# Altium PCB CFD_Chip_Test_v8_needToFixTerminationsAndLayout.PcbDoc (part 1 of 2)
Units mil, origin at the board's own origin, x right, y up, seen from the top; angles counter-clockwise.
Board outline 3180 x 3670 mil, 2 copper layers (Top Layer, Bottom Layer); 101 components, 102 nets, 456 pads, 105 vias.
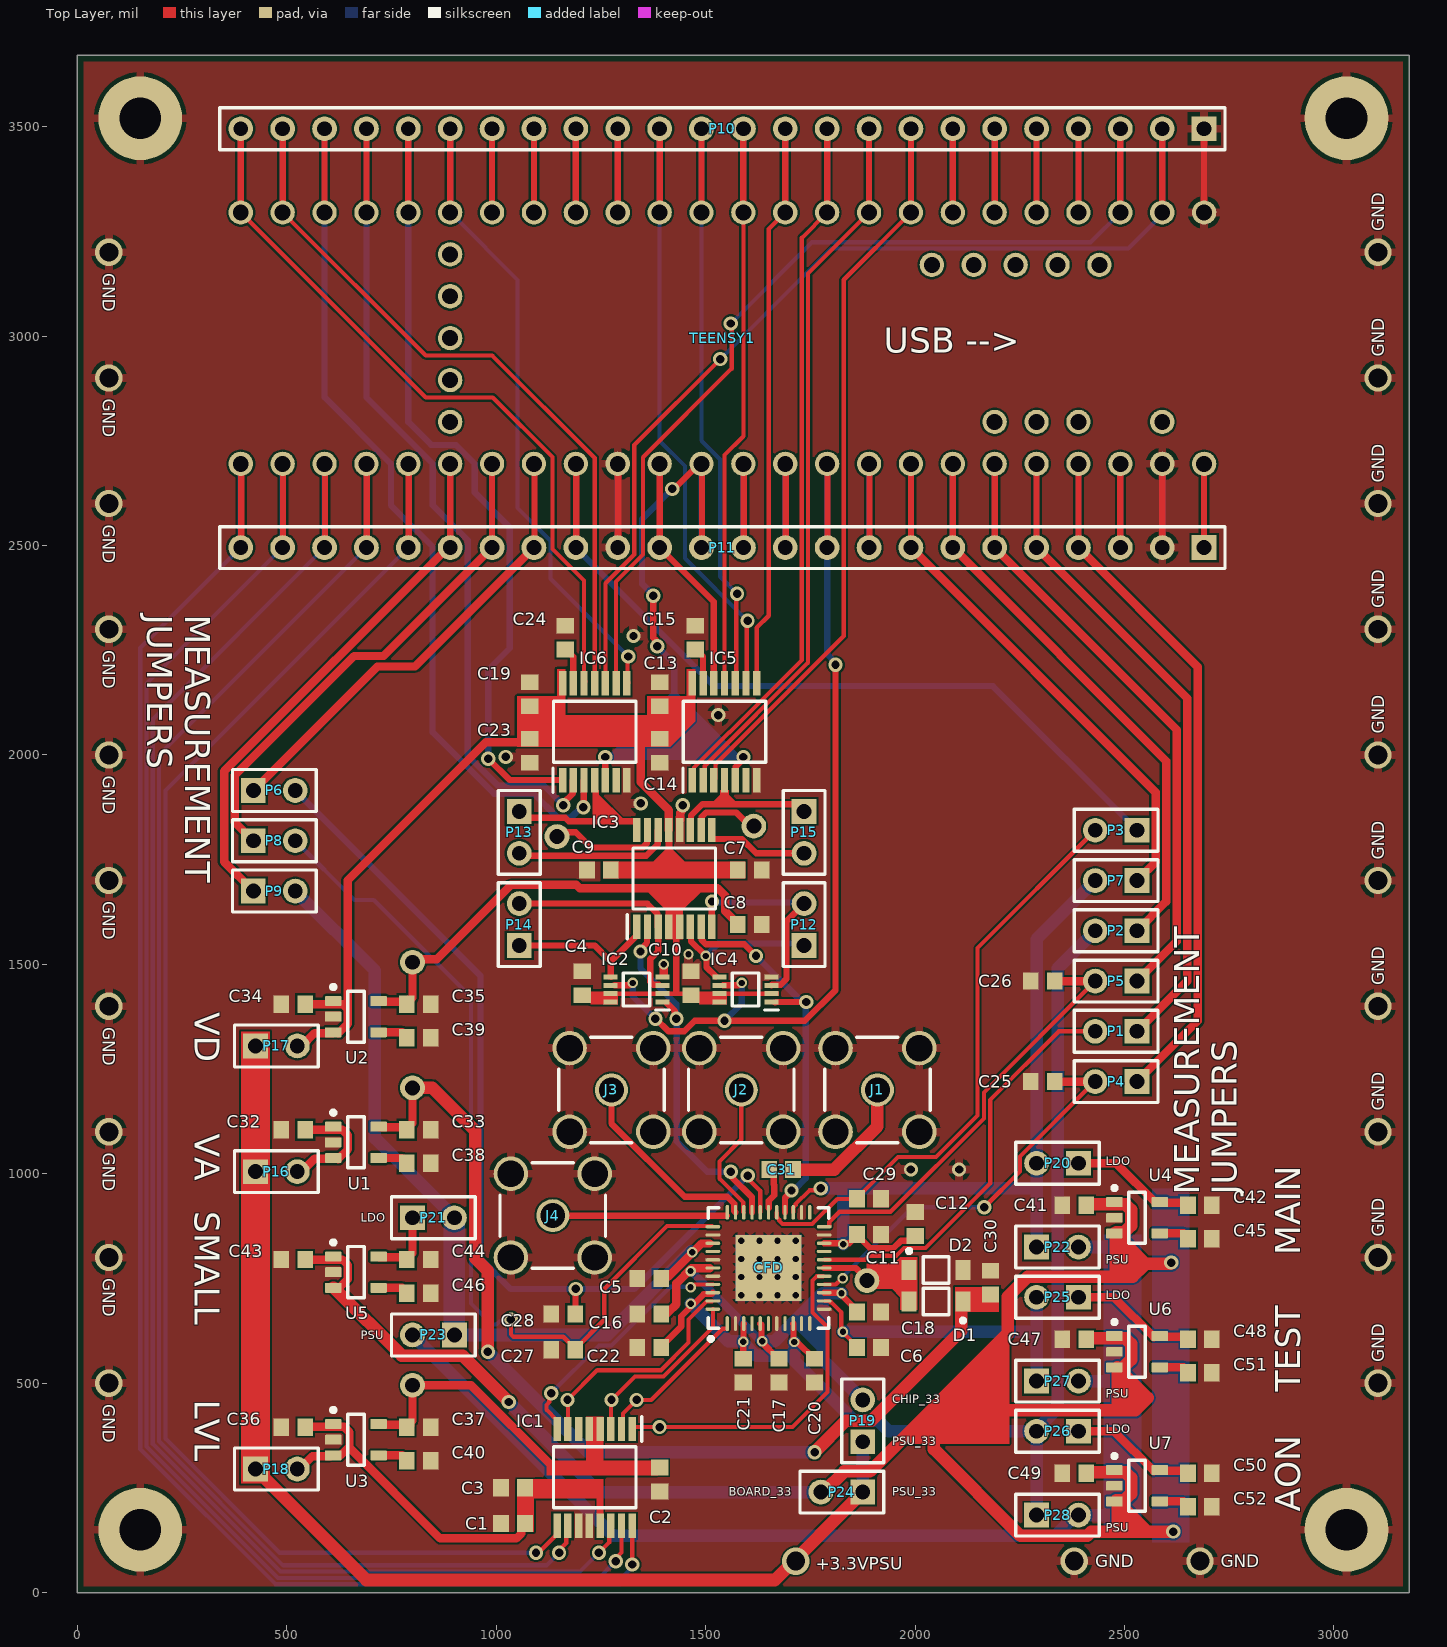
[diagram p0: Top Layer view]
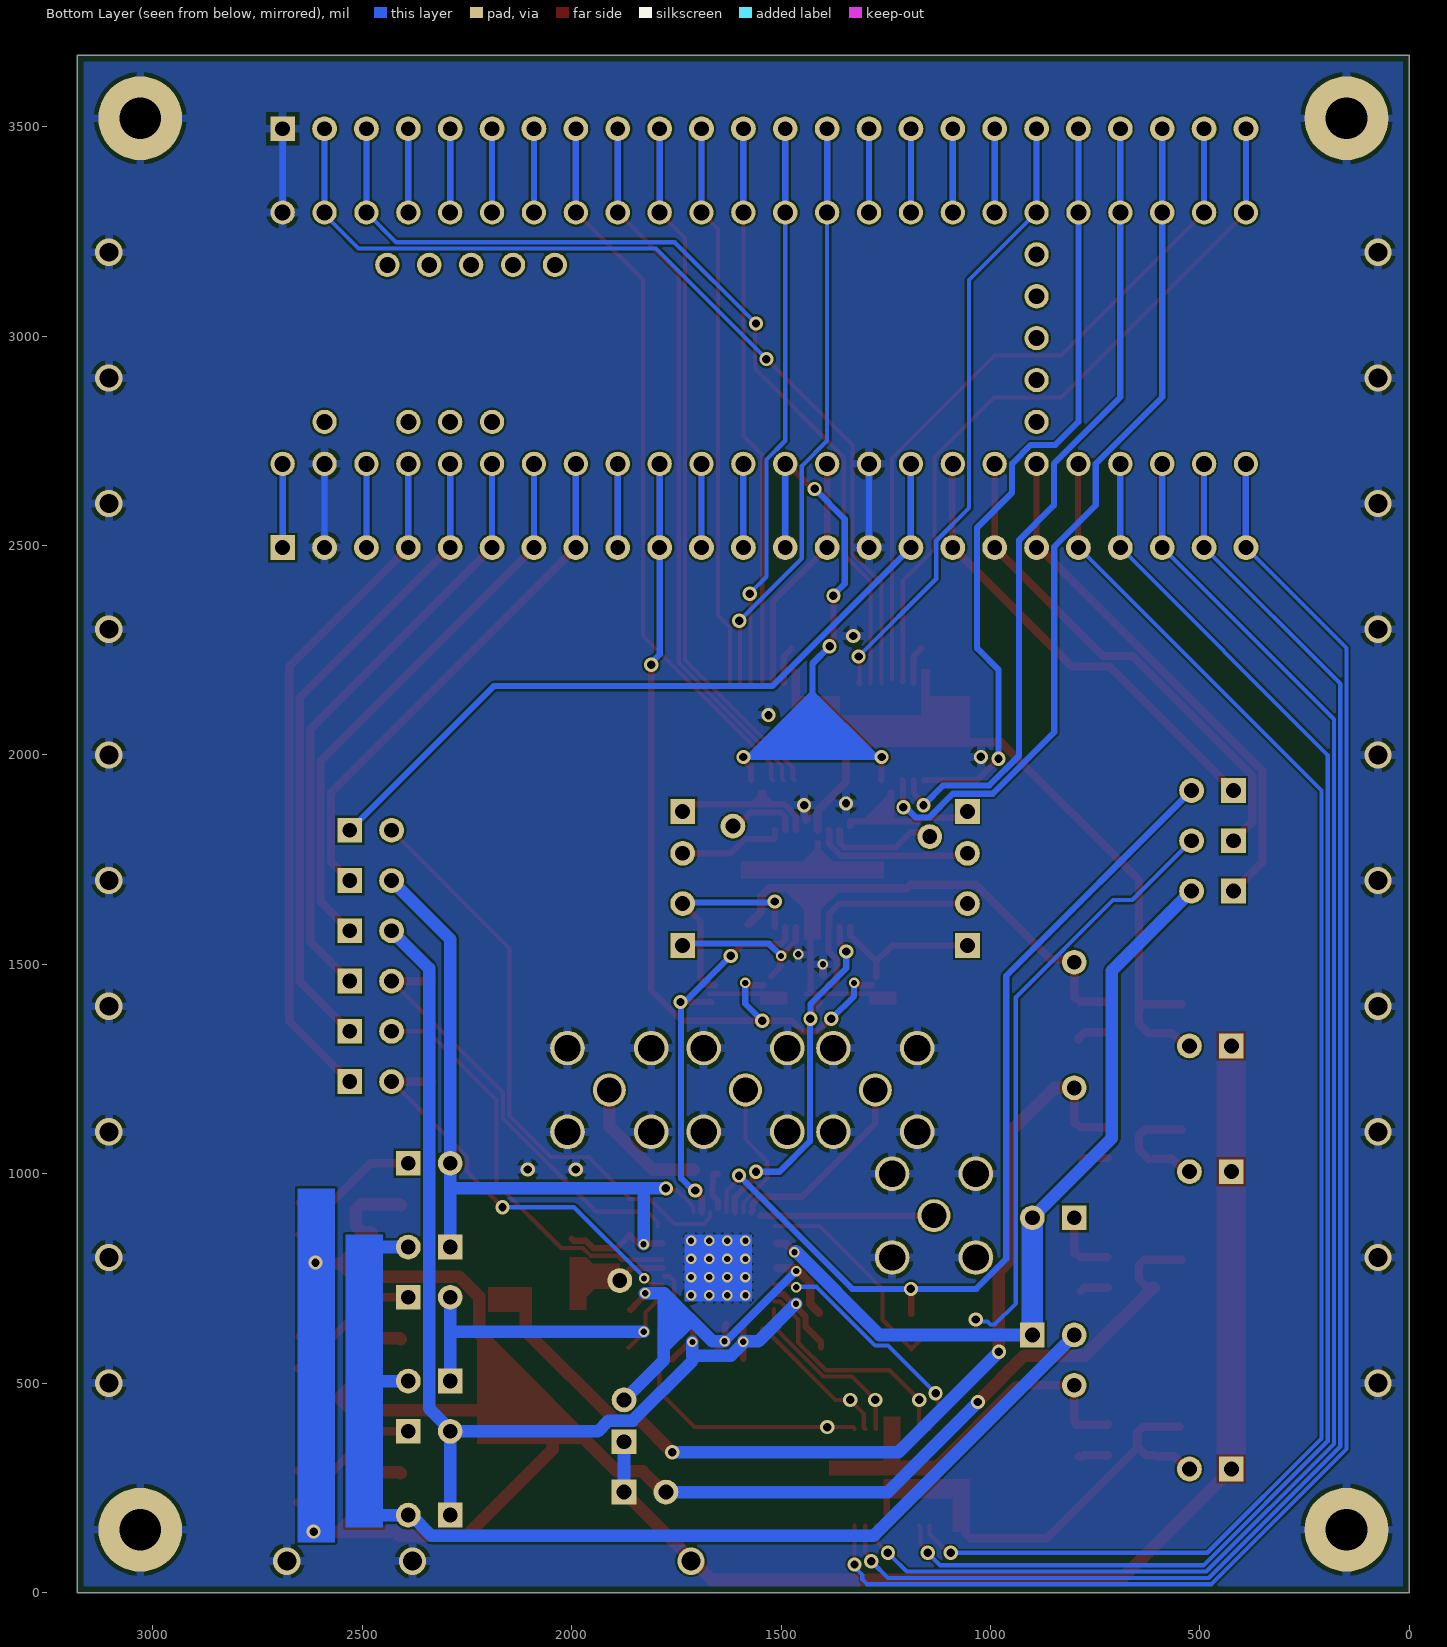
[diagram p1: Bottom Layer view, seen from below]
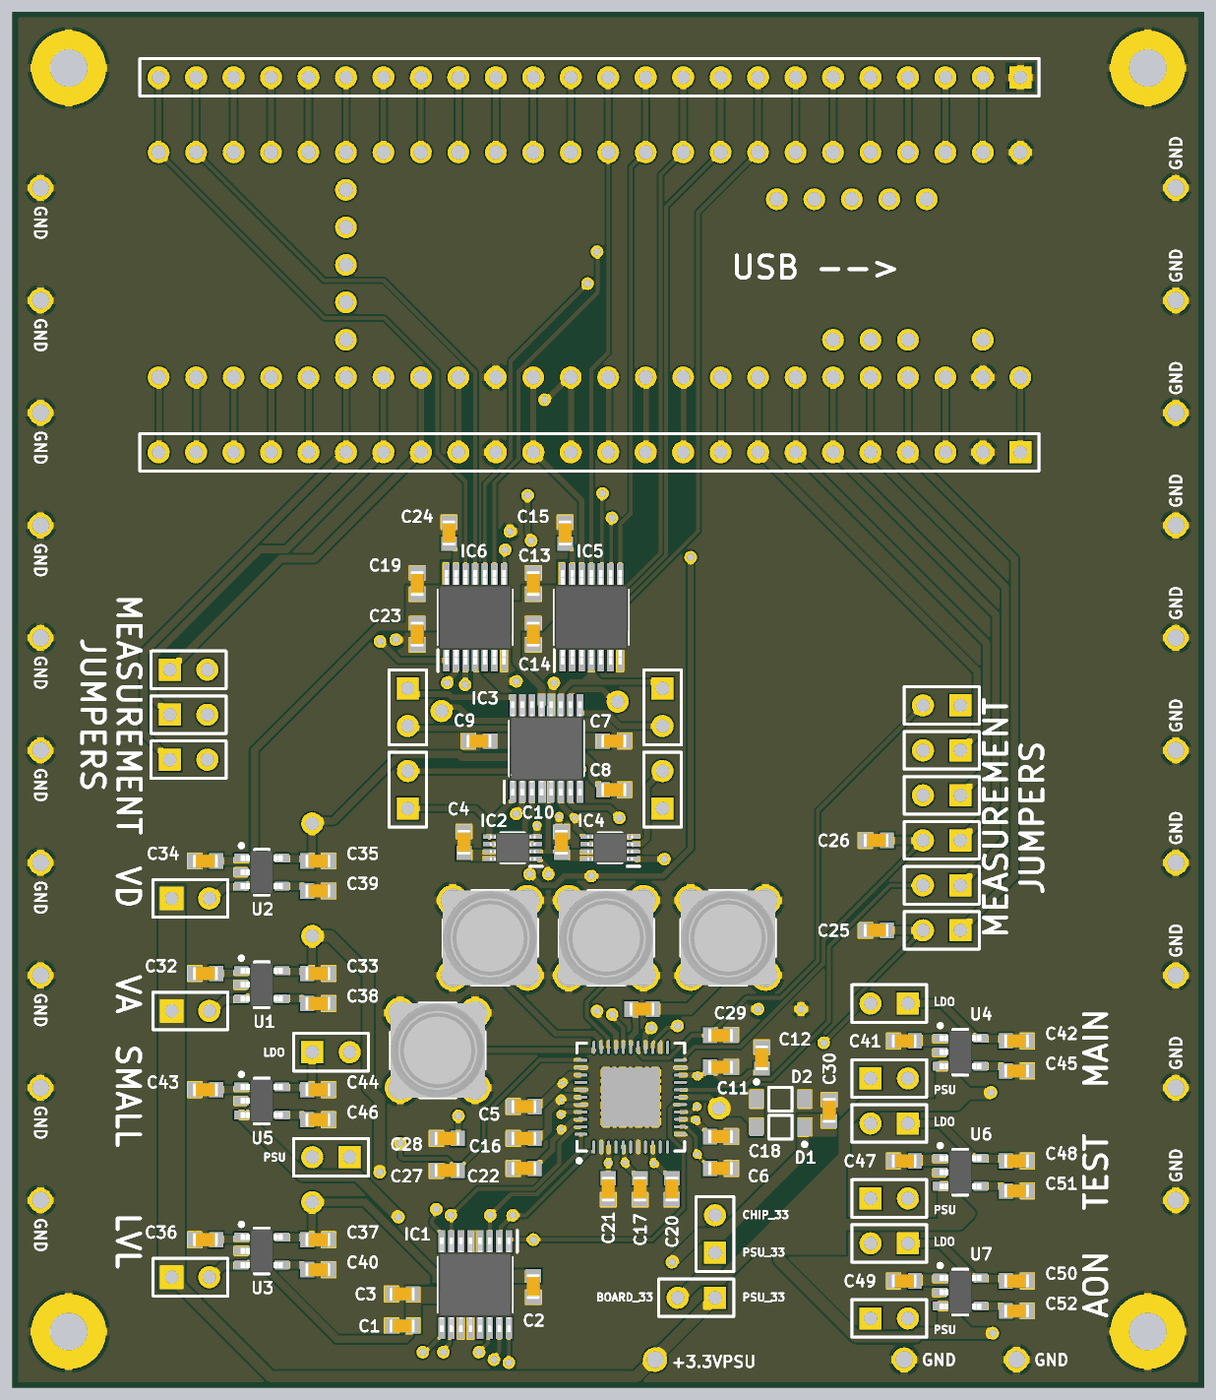
[diagram p2: 3D render of the assembled board from above, using the file's embedded part models]

## Layer stack, top to bottom
Top Solder: solder mask 0.4, Solder Resist, Dk 3.5
Top Layer: signal copper 1.4
Dielectric 1: dielectric 12.6, FR-4, Dk 4.8
Bottom Layer: signal copper 1.4
Bottom Solder: solder mask 0.4, Solder Resist, Dk 3.5

## Board outline
0,0 3180,0 3180,3670 0,3670

## Design rules (kind name [scope] priority, off if disabled: settings)
AcuteAngle [All] p1: minimum=6.00000000000000E+0001 checktracksonly=FALSE
BoardOutlineClearance [All] p1: gap=15 ignorepadtopadclearanceinfootprint=FALSE
Clearance Clearance_outa_inner2 [InNamedPolygon('outa_inner2')] p1: gap=40 ignorepadtopadclearanceinfootprint=FALSE except(0: Arc-Hole Track-Hole SMDPad-Hole THPad-Hole Via-Hole Fill-Hole Poly-Hole Region-Hole Text-Hole)
Clearance Clearance_gnd_adc_vbus [InNamedPolygon('gnd_adc') vs InNet('VBUS')] p2: gap=60 ignorepadtopadclearanceinfootprint=FALSE except(0: Arc-Hole Track-Hole SMDPad-Hole THPad-Hole Via-Hole Fill-Hole Poly-Hole Region-Hole Text-Hole)
Clearance Clearance_gnd_adc [InNamedPolygon('gnd_adc')] p3: gap=20 ignorepadtopadclearanceinfootprint=FALSE except(0: Arc-Hole Track-Hole SMDPad-Hole THPad-Hole Via-Hole Fill-Hole Poly-Hole Region-Hole Text-Hole)
Clearance Clearance_dgnd [InNamedPolygon('dgnd')] p4: gap=15 ignorepadtopadclearanceinfootprint=FALSE except(0: Arc-Hole Track-Hole SMDPad-Hole THPad-Hole Via-Hole Fill-Hole Poly-Hole Region-Hole Text-Hole)
Clearance Clearance_vbus_keepout [InPolygon vs OnLayer('Keep-Out Layer')] p5: gap=20 ignorepadtopadclearanceinfootprint=FALSE except(0: Arc-Hole Track-Hole SMDPad-Hole THPad-Hole Via-Hole Fill-Hole Poly-Hole Region-Hole Text-Hole)
Clearance Clearance_vbus [InNamedPolygon('vbus')] p6: gap=60 ignorepadtopadclearanceinfootprint=FALSE except(0: Arc-Hole Track-Hole SMDPad-Hole THPad-Hole Via-Hole Fill-Hole Poly-Hole Region-Hole Text-Hole)
Clearance Clearance_gnd [InNamedPolygon('gnd')] p7: gap=10 ignorepadtopadclearanceinfootprint=FALSE except(0: Arc-Hole Track-Hole SMDPad-Hole THPad-Hole Via-Hole Fill-Hole Poly-Hole Region-Hole Text-Hole)
Clearance [All] p8: gap=5 ignorepadtopadclearanceinfootprint=FALSE except(0: Arc-Hole Track-Hole SMDPad-Hole THPad-Hole Via-Hole Fill-Hole Poly-Hole Region-Hole Text-Hole)
DiffPairsRouting [All] p1: maxlimit=25 minlimit=5 mostfreqgap=6 toplayer_minwidth=10 toplayer_maxwidth=15 toplayer_prefwidth=15 bottomlayer_minwidth=10 bottomlayer_maxwidth=15 bottomlayer_prefwidth=15 maxuncoupledlength=500
HoleSize [All] p1: absolutevalues=TRUE maxlimit=300 minlimit=10 maxpercent=80.000 minpercent=20.000
MinimumAnnularRing [All] p1: minimumring=5
MinimumSolderMaskSliver [All] p1: minsoldermaskwidth=2
PlaneConnect [All] p1: planeconnectstyle=Relief reliefexpansion=5 reliefentries=4 reliefconductorwidth=10 reliefairgap=10
PolygonConnect PolygonConnect_4 [All vs IsNamedPolygon('NONET_L-01_P-001')] p1: thpad.connectstyle=Relief thpad.reliefconductorwidth=20 thpad.reliefentries=4 thpad.polygonreliefangle="90 Angle" thpad.airgapwidth=10 smdpad.connectstyle=Direct smdpad.reliefconductorwidth=10 smdpad.reliefentries=4 smdpad.polygonreliefangle="90 Angle" smdpad.airgapwidth=10 via.connectstyle=Relief via.reliefconductorwidth=20 via.reliefentries=4 via.polygonreliefangle="90 Angle" via.airgapwidth=10
PolygonConnect PolygonConnect_3 [All] p2: thpad.connectstyle=Relief thpad.reliefconductorwidth=20 thpad.reliefentries=4 thpad.polygonreliefangle="90 Angle" thpad.airgapwidth=10 smdpad.connectstyle=Direct smdpad.reliefconductorwidth=10 smdpad.reliefentries=4 smdpad.polygonreliefangle="90 Angle" smdpad.airgapwidth=10 via.connectstyle=Relief via.reliefconductorwidth=20 via.reliefentries=4 via.polygonreliefangle="90 Angle" via.airgapwidth=10
PolygonConnect PolygonConnect_2 [All vs IsNamedPolygon('NONET_L-01_P-001')] p3: thpad.connectstyle=Relief thpad.reliefconductorwidth=10 thpad.reliefentries=4 thpad.polygonreliefangle="90 Angle" thpad.airgapwidth=10 smdpad.connectstyle=Direct smdpad.reliefconductorwidth=10 smdpad.reliefentries=4 smdpad.polygonreliefangle="90 Angle" smdpad.airgapwidth=10 via.connectstyle=Relief via.reliefconductorwidth=20 via.reliefentries=4 via.polygonreliefangle="90 Angle" via.airgapwidth=10
PolygonConnect PolygonConnect_1 [All vs IsNamedPolygon('NONET_L-01_P-001')] p4: thpad.connectstyle=Relief thpad.reliefconductorwidth=10 thpad.reliefentries=4 thpad.polygonreliefangle="90 Angle" thpad.airgapwidth=10 smdpad.connectstyle=Direct smdpad.reliefconductorwidth=10 smdpad.reliefentries=4 smdpad.polygonreliefangle="90 Angle" smdpad.airgapwidth=10 via.connectstyle=Relief via.reliefconductorwidth=20 via.reliefentries=4 via.polygonreliefangle="90 Angle" via.airgapwidth=10
PolygonConnect [All] p5: connectstyle=Relief reliefconductorwidth=6 reliefentries=4 polygonreliefangle="90 Angle" airgapwidth=6
RoutingVias [All] p1: holewidth=12 width=24 viastyle="Through Hole" minholewidth=10 minwidth=22 maxholewidth=200 maxwidth=200
SilkToSilkClearance [All] p1: silktosilkclearance=5
SilkToSolderMaskClearance [IsPad] p1: minsilkscreentomaskgap=3 clearancetoexposedcopper=FALSE
SolderMaskExpansion [All] p1: expansion=2.2 istentingtop=FALSE
Width [All] p1: maxlimit=1000 minlimit=5 preferedwidth=10 minimp=50.000000 maximp=50.000000 favimp=50.000000
24 further rules are at their usual default settings.

## Classes and differential pairs
component class Teensy_Interface: C1 C2 C3 IC1 P1 P2 P3 P4 P5 P6 P7 P8 P9 P10 P11 TEENSY1
component class Power: C32 C33 C34 C35 C36 C37 C38 C39 C40 C41 C42 C43 C44 C45 C46 C47 C48 C49 C50 C51 C52 P16 P17 P18 P19 P20 P21 P22 P23 P24 P25 P26 P27 P28 U1 U2 U3 U4 U5 U6 U7
component class Chip_Inputs: C30 C31 D1 D2 J1 J2 J3 J4
component class Chip: C4 C5 C6 C7 C8 C9 C10 C11 C12 C13 C14 C15 C16 C17 C18 C19 C20 C21 C22 C23 C24 C25 C26 C27 C28 C29 CFD IC2 IC3 IC4 IC5 IC6 P12 P13 P14 P15

## Components (designator, comment, footprint, x,y, rotation, side; value= is the part's Value field where it differs from the comment)
C1 "1uF" CAPC1608X90X35ML10T15 1040,165 r0 top
C2 "100nF" CAPC1608X90X35ML10T15 1390,270 r270 top
C3 "100nF" CAPC1608X90X35ML10T15 1040,250 r0 top
C4 "10nF" CAPC1608X90X35ML10T15 1205,1455 r270 top
C5 "10nF" CAPC1608X90X35ML10T15 1365,750 r0 top
C6 "10nF" CAPC1608X90X35ML10T15 1890,585 r0 top
C7 "10nF" CAPC1608X90X35ML10T15 1605,1725 r180 top
C8 "100nF" CAPC1608X90X35ML10T15 1605,1595 r180 top
C9 "100nF" CAPC1608X90X35ML10T15 1245,1725 r0 top
C10 "10nF" CAPC1608X90X35ML10T15 1465,1455 r270 top
C11 "10nF" CAPC1608X90X35ML10T15 1890,855 r180 top
C12 "10nF" CAPC1608X90X35ML10T15 2000,880 r270 top
C13 "1uF" CAPC1608X90X35ML10T15 1390,2145 r90 top
C14 "100nF" CAPC1608X90X35ML10T15 1390,2010 r270 top
C15 "1uF" CAPC1608X90X35ML10T15 1475,2280 r90 top
C16 "10nF" CAPC1608X90X35ML10T15 1365,665 r0 top
C17 "10nF" CAPC1608X90X35ML10T15 1675,530 r90 top
C18 "10nF" CAPC1608X90X35ML10T15 1890,670 r180 top
C19 "1uF" CAPC1608X90X35ML10T15 1080,2145 r90 top
C20 "10nF" CAPC1608X90X35ML10T15 1760,530 r90 top
C21 "10nF" CAPC1608X90X35ML10T15 1590,530 r90 top
C22 "10nF" CAPC1608X90X35ML10T15 1365,585 r0 top
C23 "100nF" CAPC1608X90X35ML10T15 1080,2010 r270 top
C24 "1uF" CAPC1608X90X35ML10T15 1165,2280 r90 top
C25 "(10nF)" CAPC1608X90X35ML10T15 2305,1220 r0 top
C26 "(10nF)" CAPC1608X90X35ML10T15 2305,1460 r0 top
C27 "(10nF)" CAPC1608X90X35ML10T15 1160,580 r0 top
C28 "(10nF)" CAPC1608X90X35ML10T15 1160,665 r0 top
C29 "(10nF)" CAPC1608X90X35ML10T15 1890,940 r180 top
C30 "10nF" CAPC1608X90X35ML10T15 2180,740 r270 top
C31 "Value?" CAPC1608X90X35ML10T15 1680,1010 r0 top
C32 "(Value)" CAPC1608X90X35ML10T15 515,1105 r180 top
C33 "(Value)" CAPC1608X90X35ML10T15 815,1105 r0 top
C34 "(Value)" CAPC1608X90X35ML10T15 515,1405 r180 top
C35 "(Value)" CAPC1608X90X35ML10T15 815,1405 r0 top
C36 "(Value)" CAPC1608X90X35ML10T15 515,395 r180 top
C37 "(Value)" CAPC1608X90X35ML10T15 815,395 r0 top
C38 "(Value)" CAPC1608X90X35ML10T15 815,1025 r0 top
C39 "(Value)" CAPC1608X90X35ML10T15 815,1325 r0 top
C40 "(Value)" CAPC1608X90X35ML10T15 815,315 r0 top
C41 "(Value)" CAPC1608X90X35ML10T15 2380,925 r180 top
C42 "(Value)" CAPC1608X90X35ML10T15 2680,925 r0 top
C43 "(Value)" CAPC1608X90X35ML10T15 515,795 r180 top
C44 "(Value)" CAPC1608X90X35ML10T15 815,795 r0 top
C45 "(Value)" CAPC1608X90X35ML10T15 2680,845 r0 top
C46 "(Value)" CAPC1608X90X35ML10T15 815,715 r0 top
C47 "(Value)" CAPC1608X90X35ML10T15 2380,605 r180 top
C48 "(Value)" CAPC1608X90X35ML10T15 2680,605 r0 top
C49 "(Value)" CAPC1608X90X35ML10T15 2380,285 r180 top
C50 "(Value)" CAPC1608X90X35ML10T15 2680,285 r0 top
C51 "(Value)" CAPC1608X90X35ML10T15 2680,525 r0 top
C52 "(Value)" CAPC1608X90X35ML10T15 2680,205 r0 top
CFD "CFD_package" QFN50P700X700X80_HS-45N_WIDEVIAS 1650,775 r90 top
D1 "" ONSC-SOD-123-2-425-04_V 2050,695 r180 top
D2 "" ONSC-SOD-123-2-425-04_V 2050,770 r0 top
IC1 "MAX13003EEUE+" SOP65P640X110-16N 1235,275 r270 top
IC2 "NL17SZ74USG" SOP50P310X90-8N 1335,1440 r180 top
IC3 "MAX13003EEUE+" SOP65P640X110-16N 1425,1705 r90 top
IC4 "NL17SZ74USG" SOP50P310X90-8N 1595,1440 r180 top
IC5 "TDC7200PWR" SOP65P640X120-14N 1545,2055 r90 top
IC6 "TDC7200PWR" SOP65P640X120-14N 1235,2055 r90 top
J1 "5-1814832-1" TECO-5-1814832-1_V 1910,1200 r0 top
J2 "5-1814832-1" TECO-5-1814832-1_V 1585,1200 r0 top
J3 "5-1814832-1" TECO-5-1814832-1_V 1275,1200 r0 top
J4 "5-1814832-1" TECO-5-1814832-1_V 1135,900 r0 top
P1 "Header 2" HDR1X2 2530,1340 r180 top
P2 "Header 2" HDR1X2 2530,1580 r180 top
P3 "Header 2" HDR1X2 2530,1820 r180 top
P4 "Header 2" HDR1X2 2530,1220 r180 top
P5 "Header 2" HDR1X2 2530,1460 r180 top
P6 "Header 2" HDR1X2 420,1915 r0 top
P7 "Header 2" HDR1X2 2530,1700 r180 top
P8 "Header 2" HDR1X2 420,1795 r0 top
P9 "Header 2" HDR1X2 420,1675 r0 top
P10 "Header 24" HDR1X24 2690,3495 r180 top
P11 "Header 24" HDR1X24 2690,2495 r180 top
P12 "Header 2" HDR1X2 1735,1545 r90 top
P13 "Header 2" HDR1X2 1055,1865 r270 top
P14 "Header 2" HDR1X2 1055,1545 r90 top
P15 "Header 2" HDR1X2 1735,1865 r270 top
P16 "Header 2" HDR1X2 425,1005 r0 top
P17 "Header 2" HDR1X2 425,1305 r0 top
P18 "Header 2" HDR1X2 425,295 r0 top
P19 "Header 2" HDR1X2 1875,360 r90 top
P20 "Header 2" HDR1X2 2390,1025 r180 top
P21 "Header 2" HDR1X2 800,895 r0 top
P22 "Header 2" HDR1X2 2290,825 r0 top
P23 "Header 2" HDR1X2 900,615 r180 top
P24 "Header 2" HDR1X2 1875,240 r180 top
P25 "Header 2" HDR1X2 2390,705 r180 top
P26 "Header 2" HDR1X2 2390,385 r180 top
P27 "Header 2" HDR1X2 2290,505 r0 top
P28 "Header 2" HDR1X2 2290,185 r0 top
TEENSY1 "TEENSY_3.5/3.6" TEENSY_3.5/3.6 1590,2995 r180 top
U1 "TPS73218DBVT" DBV0005A_N 665,1075 r0 top
U2 "TPS73218DBVT" DBV0005A_N 665,1375 r0 top
U3 "TPS73218DBVT" DBV0005A_N 665,365 r0 top
U4 "TPS73218DBVT" DBV0005A_N 2530,895 r0 top
U5 "TPS73218DBVT" DBV0005A_N 665,765 r0 top
U6 "TPS73218DBVT" DBV0005A_N 2530,575 r0 top
U7 "TPS73218DBVT" DBV0005A_N 2530,255 r0 top

## Footprints (in the part's own frame and the unit in brackets; to place one, negate y for a bottom-side part, rotate by r counter-clockwise, add the part's x,y. Pads: shape width x height; smd on the part's side, far side on the other; paste and mask are expansions set on the pad)
CAPC1608X90X35ML10T15 [mm] "Chip Capacitor, 2-Leads, Body 1.7x0.9mm, IPC Low Density"
  rect 0.95x1.05 smd: 1(-0.725,0) 2(0.725,0)
  body extent -0.85,-0.45 0.85,0.45, height 0.9
DBV0005A_N [mm] "SOT23, 5-Leads, Body 3.05x1.75mm, Pitch 0.95mm, IPC Medium Density"
  rrect17% 1x0.6 smd: 1(-1.375,0.95) 2(-1.375,0) 3(-1.375,-0.95) 4(1.375,-0.95) 5(1.375,0.95)
  silkscreen extent -1.5,-1.55 0.5,1.92, body extent -1.42,-1.46 1.42,1.46, height 1.08
HDR1X2 [mm] "Connector; Header; 2 Position"
  rect 1.5x1.5 hole 0.9: 1(0,0)
  round 1.5 hole 0.9: 2(2.54,0)
  silkscreen extent -1.27,-1.27 3.81,1.27
HDR1X24 [mm] "Connector; Header; 24 Position"
  rect 1.5x1.5 hole 0.9: 1(0,0)
  round 1.5 hole 0.9: 2(2.54,0) 3(5.08,0) 4(7.62,0) 5(10.16,0) 6(12.7,0) 7(15.24,0) 8(17.78,0) 9(20.32,0) 10(22.86,0) 11(25.4,0) 12(27.94,0) 13(30.48,0) 14(33.02,0) 15(35.56,0) 16(38.1,0) 17(40.64,0) 18(43.18,0) 19(45.72,0) 20(48.26,0) 21(50.8,0) 22(53.34,0) 23(55.88,0) 24(58.42,0)
  silkscreen extent -1.27,-1.27 59.69,1.27
ONSC-SOD-123-2-425-04_V [mm] "SOD, 2-Leads, Body 2.69x1.6mm"
  rect 0.91x1.22 smd: 1(-1.635,0) 2(1.635,0)
  silkscreen extent -1.76,-0.8 0.78,1.28, body extent -1.35,-0.8 1.35,0.8, height 1.35
QFN50P700X700X80_HS-45N_WIDEVIAS [mm] "QFN, 44-Leads, Body 7.00x7.00mm, Pitch 0.50mm, Thermal Pad 4.00x4.00mm, IPC Medium Density"
  oval 0.9x0.2 smd: 1(-3.375,2.5) 2(-3.375,2) 3(-3.375,1.5) 4(-3.375,1) 5(-3.375,0.5) 6(-3.375,0) 7(-3.375,-0.5) 8(-3.375,-1) 9(-3.375,-1.5) 10(-3.375,-2) 11(-3.375,-2.5) 23(3.375,-2.5) 24(3.375,-2) 25(3.375,-1.5) 26(3.375,-1) 27(3.375,-0.5) 28(3.375,0) 29(3.375,0.5) 30(3.375,1) 31(3.375,1.5) 32(3.375,2) 33(3.375,2.5)
  oval 0.2x0.9 smd: 12(-2.5,-3.375) 13(-2,-3.375) 14(-1.5,-3.375) 15(-1,-3.375) 16(-0.5,-3.375) 17(0,-3.375) 18(0.5,-3.375) 19(1,-3.375) 20(1.5,-3.375) 21(2,-3.375) 22(2.5,-3.375) 34(2.5,3.375) 35(2,3.375) 36(1.5,3.375) 37(1,3.375) 38(0.5,3.375) 39(0,3.375) 40(-0.5,3.375) 41(-1,3.375) 42(-1.5,3.375) 43(-2,3.375) 44(-2.5,3.375)
  rect 4x4 smd: 35(0,0)
  silkscreen extent -4.42,-3.65 3.65,3.65, body extent -3.5,-3.5 3.5,3.5, height 0.8
SOP50P310X90-8N [mm]
  rect 0.85x0.3 smd: 1(-1.575,0.75) 2(-1.575,0.25) 3(-1.575,-0.25) 4(-1.575,-0.75) 5(1.575,-0.75) 6(1.575,-0.25) 7(1.575,0.25) 8(1.575,0.75)
  silkscreen extent -2,-1 0.8,1.25, body extent -1.55,-1 1.55,1, height 0.9
SOP65P640X110-16N [mm]
  rect 1.475x0.45 smd: 1(-2.938,2.275) 2(-2.938,1.625) 3(-2.938,0.975) 4(-2.938,0.325) 5(-2.938,-0.325) 6(-2.938,-0.975) 7(-2.938,-1.625) 8(-2.938,-2.275) 9(2.938,-2.275) 10(2.938,-1.625) 11(2.938,-0.975) 12(2.938,-0.325) 13(2.938,0.325) 14(2.938,0.975) 15(2.938,1.625) 16(2.938,2.275)
  silkscreen extent -3.67,-2.5 1.85,2.85, body extent -3.2,-2.5 3.2,2.5, height 1.1
SOP65P640X120-14N [mm]
  rect 1.475x0.45 smd: 1(-2.938,1.95) 2(-2.938,1.3) 3(-2.938,0.65) 4(-2.938,0) 5(-2.938,-0.65) 6(-2.938,-1.3) 7(-2.938,-1.95) 8(2.938,-1.95) 9(2.938,-1.3) 10(2.938,-0.65) 11(2.938,0) 12(2.938,0.65) 13(2.938,1.3) 14(2.938,1.95)
  silkscreen extent -3.67,-2.5 1.85,2.52, body extent -3.2,-2.5 3.2,2.5, height 1.13
TECO-5-1814832-1_V [mm] "THD, 5-Leads, Body 6.4x6.4mm, Pitch 5.08mm"
  round 2 hole 1.5: 1(0,0)
  round 2.1 hole 1.6: 2(-2.54,2.54) 3(-2.54,-2.54) 4(2.54,-2.54) 5(2.54,2.54)
  silkscreen extent -3.2,-3.2 3.2,3.2, body extent -3.21,-3.21 3.19,3.19, height 9.5
TEENSY_3.5/3.6 [mil]
  round 58 / inner round 60 / far side round 58 hole 38: 0/RX(-1000,-300) 1/TX(-900,-300) 2(-800,-300) 3/CANTX(-700,-300) 3V3(300,-300) 3V3_2(700,-100) 3V3_LO(-900,300) 4/CANRX(-600,-300) 5(-500,-300) 6(-400,-300) 7(-300,-300) 8(-200,-300) 9/CS(-100,-300) 10/CS(0,-300) 11/MOSI(100,-300) 12/MISO(200,-300) 13/SCK(200,300) 14/A0(100,300) 15/A1(0,300) 16/A2(-100,300) 17/A3(-200,300) 18/A4/SDA(-300,300) 19/A5/SCL(-400,300) 20/A6(-500,300) 21/A7(-600,300) 21/DAC0(500,300) 22/A8(-700,300) 23/A9(-800,300) 24(400,-300) 25(500,-300) 26(600,-300) 27(700,-300) 28(800,-300) 29(900,-300) 30(1000,-300) 31/A12(1100,-300) 32/A13(1200,-300) 33/A14(1200,300) 34/A15(1100,300) 35/A16(1000,300) 36/A17(900,300) 37/A18(800,300) 38/A19(700,300) 39/A20(600,300) A10(-700,200) A11(-600,200) A22/DAC1(400,300) AGND(-1000,300) AREF(-800,200) GND(-1100,-300) GND2(300,300) GND3(700,0) PROG(700,100) RESET(700,200) U5V(-850,-175) UD+(-650,-175) UD-(-750,-175) UGND1(-550,-175) UGND2(-450,-175) VBAT(700,-200) VIN(-1100,300) VUSB(-1000,200)

## Part data
C1 C2 C3 C4 C5 C6 C7 C8 C9 C10 C11 C12 C13 C14 C15 C16 C17 C18 C19 C20 C21 C22 C23 C24 C25 C26 C27 C28 C29 C30 C31 C32 C33 C34 C35 C36 C37 C38 C39 C40 C41 C42 C43 C44 C45 C46 C47 C48 C49 C50 C51 C52: library part CMP-2000-04945-1, "0603", Capacitance=22pF, Dielectric=C0G, Manufacturer=Murata, Package Description="2-Pin Surface Mount Device, Body 1.6 x 0.8 mm", Package Reference=603, Rated Voltage=50V, Tolerance (%)=±5%, Case Size/Dimension=0603, Datasheet URL=https://datasheet.ciiva.com/11786/0900766b807a1cab-11786398.pdf, Datasheet Version=Jul-06, Manufacturer URL=http://www.murata.com/
D1 D2: library part CMP-1060-00509-1, "Zener Voltage Regulator, 2-Pin SOD-123, Pb-Free, Tape and Reel", Manufacturer="On Semiconductor", PartNumber=MMSZ4679T1G, ComponentLink1Description="Manufacturer URL", ComponentLink1URL=http://www.onsemi.com/, ComponentLink2Description=Datasheet, ComponentLink2URL=http://www.onsemi.com/pub_link/Collateral/MMSZ4678T1-D.PDF, ComponentLink3Description="Package Specification", ComponentLink3URL=http://www.onsemi.com/pub_link/Collateral/425-04.PDF, DatasheetVersion="Rev. 9", Mounting Technology="Surface Mount", P Max (W)=0.5, PackageDescription="2-Pin SOD, Body 1.6 x 2.69 mm", PackageReference=SOD-123-2-425-04, PackageVersion="Rev. G, 10/2009", Packing="Tape and Reel", RoHS=Pb-Free, VZ Typ (V)=2
IC1 IC3: "Integrated Circuit", Manufacturer_Name="Maxim Integrated", Datasheet Link=https://pdfserv.maximintegrated.com/en/ds/MAX13000E-MAX13005E.pdf, Height=1.1mm, Manufacturer_Part_Number=MAX13003EEUE+
IC2 IC4: "Flip Flops 1.65-5.5V CMOS Single D-Type", Manufacturer_Name="ON Semiconductor", Datasheet Link=http://www.onsemi.com/pub/Collateral/NL17SZ74-D.PDF, Height=0.9mm, Manufacturer_Part_Number=NL17SZ74USG
IC5 IC6: "Integrated Circuit", Manufacturer_Name="Texas Instruments", Datasheet Link=http://www.ti.com/lit/gpn/tdc7200, Height=1.2mm, Manufacturer_Part_Number=TDC7200PWR
J1 J2 J3 J4: library part CMP-2000-05415-1, "SMA Connector, Pitch 5.08 mm, 1 Position, Height 9.5 mm, Tail Length 4 mm, -65 to 165 degC, RoHS, Bulk", Frequency Max=3GHz, Manufacturer="TE Connectivity", Package Description="SMA Connector, Pitch 5.08 mm, 1 Position, Height 9.5 mm, Tail Length 4 mm", Coaxial Cable Types=-, Coaxial Termination=Solder, Connector Body Style=StraightJack, Connector Mounting=PCBMount, Connector Type=SMACoaxial, Contact Material=BerylliumCopper, Contact Plating=GoldPlatedContacts, Datasheet URL=http://www.onlinecomponents.com/productFiles/mf-AMP/eng_cd_1814832_a.pdf, Datasheet Version="Rev. B1, 03/2011", Impedance=50ohm, Manufacturer URL=http://www.te.com/, Package Reference=5-1814832-1, Product Range=ZDCSeries, SVHC=NoSVHC(15-Jun-2015)
P1 P2 P3 P4 P5 P6 P7 P8 P9 P12 P13 P14 P15 P16 P17 P18 P19 P20 P21 P22 P23 P24 P25 P26 P27 P28: "Header, 2-Pin", LatestRevisionDate=17-Jul-2002, LatestRevisionNote="Re-released for DXP Platform.", Publisher="Altium Limited"
P10 P11: "Header, 24-Pin", LatestRevisionDate=17-Jul-2002, LatestRevisionNote="Re-released for DXP Platform.", Publisher="Altium Limited"
U1 U2 U3 U4 U5 U6 U7: library part CMP-0394-00378-2, "Single Output Fast Transient Response LDO, 200 mA, Fixed 1.8 V Output, 1.7 to 5.5 V Input, with Reverse Current Protection, 5-pin SOT-23 (DBV), -40 to 85 degC, Green (RoHS & no Sb/Br)", Manufacturer="Texas Instruments", Accuracy(%)=1, Code_JEDEC=MO-178, ComponentLink1Description="Manufacturer URL", ComponentLink1URL=http://www.ti.com/, ComponentLink2Description=Datasheet, ComponentLink2URL=http://www.ti.com/general/docs/lit/getliterature.tsp?genericPartNumber=TPS73218&fileType=pdf, ComponentLink3Description="Package Specification", ComponentLink3URL=http://www.ti.com/litv/pdf/mpds018i, DatasheetVersion=SBVS037O, Eco-Plan="Green (RoHS & no Sb/Br)", Fixed Output Options(V)=1.8, Iout(Max)(A)=0.25, Iq(Typ)(mA)=0.4, Mounting Technology="Surface Mount", PackageDescription="5-Pin Plastic Small Outline, Body 1.60 Ãƒâ€” 2.90 mm, Pitch 0.95 mm", PackageReference=DBV0005A, PackageVersion=4073253-4/K, PartNumber=TPS73218DBVT, SubFamily="Single Channel LDO", Vdo(Typ)(mV)=40, Vin(Max)(V)=5.5, Vin(Min)(V)=1.7, Vout Adj(Max)(V)=1.8, Vout Adj(Min)(V)=1.8
TEENSY1: DeviceSetName=TEENSY_3.5/3.6, GateName_1=G$1, LibraryName=Teensy356, Package=TEENSY_3.5/3.6, SymbolName_1=TEENSY_3.5/3.6

## Free pads (board coordinates)
  round 200 hole 100: 3(150,150) 3(150,3520) 3(3030,150) 3(3030,3520)
  round 59.06 hole 35.43: 4(800,495) 4(800,1205) 4(800,1505) 4(1145,1805) 4(1615,1830) 4(1885,745)

## Via types
v1: diameter 34, hole 20, Top Layer to Bottom Layer, 50 vias
v2: diameter 25, hole 15, Top Layer to Bottom Layer, 32 vias
v3: diameter 65, hole 45, Top Layer to Bottom Layer, 23 vias

## Nets (pads, with @x,y where several pads share a name; then routed paths per layer and width w, separated by ;. In a path a pad name is that pad's centre, name@x,y a point inside that pad or via, vN(x,y) a via of type N, cw(c..) or ccw(c..) an arc to the next point about the centre after c; other vN are vias at no path point)
+1.8VA: C30.2 C33.1 D1.1 pad.4@800,1205 U1.5 | length 2342.3
  Top Layer w20: U1.5@720.94,1110.59 785.59,1110.59 C33.1@790,1115 ; C33.1@800,1120.51 pad.4@800,1205
  Top Layer w30: pad.4@800,1205 847.43,1205 949.53,1102.9 949.53,798.73 980,768.25 v1(980,575) ; v1(1760,335) 1835.47,410.47 1895.51,410.47 2110,624.96 2110,685 2155,685
  Bottom Layer w30: v1(980,575) 1220,335 v1(1760,335)
+1.8VD: C4.2 C8.2 C10.2 C35.1 IC2.2 IC2.7 IC2.8 IC3.4 IC3.5 IC4.2 IC4.7 IC4.8 pad.4@800,1505 U2.5 | length 1206.1
  Top Layer w15: 1429.67,1435 1429.67,1569.67 IC3.5@1430,1570
  Top Layer w20: U2.5@720.94,1410.59 785.59,1410.59 C35.1@790,1415 ; C35.1@800,1420.51 800,1505 807.47,1512.47 858.04,1512.47 1035.1,1689.53 1191.35,1689.53 1198.87,1682 1528.25,1682 1547,1663.25 1547,1626.43 C8.2@1578.43,1595
+1.8VD_SHIFT: C2.1 C37.1 IC1.4 IC1.5 pad.4@800,495 U3.5 | length 594.7
  Top Layer w20: U3.5 720.94,400.59 794.41,400.59 795,400 795,405.51 800,410.51 800,495 940,495 1135,300 1135,295
+1.8VDDAON: C50.1 P26.1 U7.5 | length 287.8
  Top Layer w20: P26.1 2475,385 U7.5@2570,290 ; U7.5@2585.94,290.59 C50.1@2654.41,290.59
+1.8VDDMAIN: C42.1 P20.1 U4.5 | length 287.8
  Top Layer w20: P20.1 2480,1025 U4.5@2575,930 ; U4.5@2585.94,930.59 C42.1@2649.41,930.59
+1.8VDDSMALL: C44.1 P21.1 U5.5 | length 155.4
  Top Layer w20: U5.5@720.94,800.59 785.59,800.59 C44.1@790,805 ; C44.1@800,810.51 P21.1
+1.8VDDTEST: C48.1 P25.1 U6.5 | length 282.8
  Top Layer w20: P25.1 2475,705 U6.5@2570,610 ; U6.5@2585.94,610.59 C48.1@2649.41,610.59
+1.8VPSU: P22.2 P23.2 P27.2 P28.2 | length 2044.1
  Bottom Layer w30: P23.2 1279.53,135.47 2334.13,135.47 2383.66,185 P28.2 2470,185 ; P27.2 2470,505 ; P22.2 2465,825
+3.3VA: C32.1 P16.2 U1.1 U1.3 | length 260.1
  Top Layer w20: P16.2@535.57,1005 566.36,1035.79 U1.3@609.06,1035.79 ; C32.1 632.4,1105 645.55,1091.85 645.55,1058.15 U1.3@622.4,1035
+3.3VCHIP: C41.1 C43.1 C47.1 C49.1 P24.2 U4.1 U4.3 U5.1 U5.3 U6.1 U6.3 U7.1 U7.3 | length 4798.1
  Top Layer w20: C43.1 632.4,795 645.55,781.85 645.55,748.15 U5.3@622.4,725
  Top Layer w30: U5.3 612.36,727.6 774.49,565.47 919.53,565.47 v1(1030,455) ; P24.2 1781.34,240 1830.87,289.53 1891.87,289.53 2220.67,618.33 2220.67,705.71 2269.49,754.53 2519.53,754.53 2545,780 ; 2045,440 2045,435 ; C49.1 2410.35,286.81 2502.66,286.81 2515.55,273.92 2515.55,236.08 2500.26,220.79 U7.3@2480.55,220.79 ; C47.1 2410.35,606.81 2502.66,606.81 2515.55,593.92 2515.55,556.08 2500.26,540.79 ; C41.1 2410.35,926.81 2502.66,926.81 2515.55,913.92 2515.55,876.08 2500.26,860.79 U4.3@2480.55,860.79 ; U4.3 2477.36,857.6 2549.96,785 v1@2610,785 ; U7.3@2482.36,217.6 2554.96,145 ; U6.3@2482.36,537.6 2554.96,465 2524.96,435 2045,435 ; v1@2615,145 2554.96,145 ; 2045,435 2045,342.66 2252.19,135.47 2410.51,135.47 2420.04,145 2554.96,145
  Bottom Layer w30: v1(1030,455) 1245,240 P24.2 P24.2@1780,235
  other v1: 2616.21,145.51 2611.61,787.8
+3.3VD: C7.2 C9.2 C13.1 C14.1 C19.1 C23.1 C34.1 IC3.13 IC5.14 IC6.14 P17.2 U2.1 U2.3 | length 1347.1
  Top Layer w20: P17.2@535.57,1305 566.36,1335.79 U2.3@609.06,1335.79 ; C34.1 610.87,1405 632.4,1405 645.55,1391.85 ; U2.3@622.4,1335 645.55,1358.15 645.55,1391.85 ; 1055,2030 974.75,2030 645.55,1700.81 645.55,1391.85 ; 1345,2025 1345,1935 1412.2,1867.8 IC3.13
+3.3VD_SHIFT: C1.2 C3.2 C36.1 IC1.13 P18.2 U3.1 U3.3 | length 809.7
  Top Layer w20: P18.2@530.57,295 561.36,325.79 U3.3@604.06,325.79 ; C36.1@547.46,395.91 636.32,395.91 649.47,382.76 649.47,349.06 628.01,327.6 U3.3 ; 647.8,347.4 865.87,129.33 1048.13,129.33 1059.84,141.05 1059.84,156.3 C1.2
+3.3VPSU: P16.1 P17.1 P18.1 P19.1 P24.1 | length 1773.8
  Top Layer w30: P18.1 690,30 1665,30 P24.1
  Bottom Layer w30: P24.1@1870,235 P24.1 P19.1
  other v3: 1715,75
/RST_TIME: IC2.6 IC4.6 P11.10 TEENSY1.17/A3 | length 2257.4
  Top Layer w15: IC2.6@1282.22,1449.84 1317.3,1449.84 1323.08,1455.62 v2(1325.79,1455.62) ; v1(1380,1370) 1381.14,1370 1411.14,1340 1448.86,1340 1473.86,1365 v1(1545,1365) 1736.72,1365 1810,1438.28 v1(1810,2215) ; IC4.6@1542.22,1450 1577.46,1450 1583.08,1455.62 v2(1585.79,1455.62) ; P11.10@1791.05,2495.68 TEENSY1.17/A3@1791.05,2695.68
  Bottom Layer w15: v2(1325.79,1455.62) 1325.79,1424.21 v1(1380,1370) ; v1(1545,1365) 1585.79,1405.79 1585.79,1454.21 v2@1585,1455 ; P11.10@1785,2495 1790,2490 1790,2240.14 1810,2220.14 v1(1810,2215) ; P11.10@1790,2500 TEENSY1.17/A3@1790,2700
/SCAN_IN: CFD.1 IC1.2 | length 364.7
  Top Layer w10: IC1.2 1302.83,394.53 1302.83,427.83 v1(1335,460) 1370,460 1540,630 1545,630
/SCAN_IN_33: IC1.15 P11.23 TEENSY1.34/A15 | length 4035.4
  Top Layer w10: v1(1285,75) 1285,81.49 1298.98,95.47 IC1.15
  Top Layer w15: P11.23@491.05,2495.68 TEENSY1.34/A15@491.05,2695.68
  Bottom Layer w10: P11.23 165,2170 165,348.79 478.79,35 1245,35 1280,70 v1@1285,70
  Bottom Layer w15: P11.23@490.26,2495.66 TEENSY1.34/A15@490.26,2695.66
/SCAN_LOAD: CFD.44 IC1.3 | length 426.9
  Top Layer w10: IC1.3 1274.19,391.48 1274.19,459.19 v1(1275,460) 1330.88,515.88 1399.15,515.88 1517.13,633.86 CFD.44
/SCAN_LOAD_33: IC1.14 P11.22 TEENSY1.35/A16 | length 3991.4
  Top Layer w10: v1(1245,95) 1269.53,119.53 1269.53,155.47 IC1.14
  Top Layer w15: P11.22@591.05,2495.68 TEENSY1.35/A16@591.05,2695.68
  Bottom Layer w10: P11.22 180,2085 180,355 485,50 1200,50 1237.16,87.16 v1@1243.76,87.16
  Bottom Layer w15: P11.22@590.26,2495.66 TEENSY1.35/A16@590.26,2695.66
/SCAN_OUT: CFD.41 IC1.8 | length 595.4
  Top Layer w10: v1(1131.16,476.16) 1126.57,471.57 1126.57,455.08 1119.59,448.1 1119.59,436.69 1145.43,410.85 IC1.8 ; v2(1463.81,728.81) 1467.87,728.81 1474.69,735.63 CFD.41
  Bottom Layer w10: v1(1131.16,476.16) 1245,590 1275.36,590 1415.36,730 1462.62,730 v2(1463.81,728.81)
/SCAN_OUT_33: IC1.9 P11.20 TEENSY1.37/A18 | length 3659.6
  Top Layer w10: v1(1095,95) 1101.28,95 1145.43,139.15 IC1.9
  Top Layer w15: P11.20@791.05,2495.68 TEENSY1.37/A18@791.05,2695.68
  Bottom Layer w10: P11.20 210,1915 210,367.43 482.43,95 v1(1095,95) v1@1100,95
/SPI_CS_MAIN: IC5.11 P10.12 TEENSY1.10/CS | length 1540
  Top Layer w10: IC5.11 1545,2715.86 1590,2760.86 1590,3285 TEENSY1.10/CS@1585,3290
  Top Layer w15: TEENSY1.10/CS P10.12
  Bottom Layer w15: TEENSY1.10/CS@1590,3300 P10.12@1590,3500
/SPI_CS_SMALL: IC6.11 P10.23 TEENSY1.31/A12 | length 1916.5
  Top Layer w10: TEENSY1.31/A12 831.5,2953.5 990.19,2953.5 1235,2708.69 IC6.11@1235,2180
  Top Layer w15: TEENSY1.31/A12 P10.23
  Bottom Layer w15: TEENSY1.31/A12 P10.23
/TIME_MAIN_18: IC3.8 IC4.3 P12.2 | length 519.5
  Top Layer w15: IC3.8 1514.78,1589.55 1514.78,1649.78 v1(1515,1650) ; IC4.3 1658.29,1451.12 1678.92,1451.12 1692.97,1465.18 1692.97,1602.97 P12.2
  Bottom Layer w15: v1(1515,1650) 1517.5,1647.5 1722.5,1647.5 P12.2@1730,1640
/TIME_MAIN_33: IC3.9 P15.2 | length 255.3
  Top Layer w15: IC3.9 1514.57,1800.49 1515.93,1799.13 1586.43,1799.13 1620.56,1765 P15.2
/TIME_SMALL_18: IC2.3 IC3.3 P14.2 | length 532.6
  Top Layer w15: P14.2 1360.93,1645 1385,1620.93 IC3.3@1385,1590 ; IC3.3 1386.61,1531.61 1367.78,1512.78 1367.78,1458.44 1375.1,1451.12 IC2.3@1387.78,1451.12
/TIME_SMALL_33: IC3.14 P13.2 | length 378.7
  Top Layer w15: P13.2 1060.87,1759.13 1357.75,1759.13 1385.26,1786.64 1385.26,1819.31 IC3.14
GND: C1.1 C2.2 C3.1 C4.1 C5.1 C6.2 C7.1 C8.1 C9.1 C10.1 C11.1 C12.1 C13.2 C14.2 C15.2 C16.1 C17.1 C18.1 C19.2 C20.1 C21.1 C22.1 C23.2 C24.2 C25.1 C26.1 C27.1 C28.1 C29.1 C30.1 C32.2 C33.2 C34.2 C35.2 C36.2 C37.2 C38.2 C39.2 C40.2 C41.2 C42.2 C43.2 C44.2 C45.2 C46.2 C47.2 C48.2 C49.2 C50.2 C51.2 C52.2 CFD.2 CFD.7 CFD.12 CFD.21 CFD.24 CFD.35 CFD.38 CFD.40 D2.2 IC1.11 IC1.12 IC2.4 IC3.12 IC4.4 IC5.7 IC6.7 J1.2 J1.3 J1.4 J1.5 J2.2 J2.3 J2.4 J2.5 J3.2 J3.3 J3.4 J3.5 J4.2 J4.3 J4.4 J4.5 P10.1 P11.2 P11.15 pad.3 TEENSY1.AGND TEENSY1.GND TEENSY1.GND2 U1.2 U2.2 U3.2 U4.2 U5.2 U6.2 U7.2 | length 1262.3
  Top Layer w15: P11.15@1291.05,2495.68 TEENSY1.GND2@1291.05,2695.68 ; P11.2 TEENSY1.AGND ; TEENSY1.GND P10.1
  Top Layer w20: IC2.4@1400,1475 v2(1400,1500) ; IC3.12@1439.53,1845 1439.53,1861.31 1442.32,1864.1 1442.32,1877.32 v1(1445,1880)
  Bottom Layer w15: P11.15@1290.26,2495.66 TEENSY1.GND2@1290.26,2695.66 ; P11.2@2590,2500 TEENSY1.AGND@2590,2700 ; TEENSY1.GND@2690,3300 P10.1@2690,3500
  other v1: 1990,1010 2105,1010 1344.92,1884.15 1022.85,1995.26 1530,2095 1327.52,2283.72
  other v2: 1585.04,710.04 1628.35,710.04 1671.65,710.04 1714.96,710.04 1585.04,753.35 1628.35,753.35 1671.65,753.35 1714.96,753.35 1585.04,796.65 1628.35,796.65 1671.65,796.65 1714.96,796.65 1585.04,839.96 1628.35,839.96 1671.65,839.96 1714.96,839.96 1458.96,1523.7
  other v3: 2380,75 2680,75 75,500 3105,500 75,800 3105,800 75,1100 3105,1100 75,1400 3105,1400 75,1700 3105,1700 75,2000 3105,2000 75,2300 3105,2300 75,2600 3105,2600 75,2900 3105,2900 75,3200 3105,3200
IIN: C31.2 J1.1 | length 331
  Top Layer w30: C31.2 1806.75,1010 1910,1113.25 J1.1
IIN_COUPLE: C31.1 CFD.28 | length 97.2
  Top Layer w15: CFD.28@1650.73,918.09 1650.73,935.75 1663.89,948.9 1663.89,973.34 1662.66,974.57 1662.66,996.83 1659.49,1000 C31.1@1651.46,1000
NC_2: P10.4 TEENSY1.2 | length 400
  Top Layer w15: TEENSY1.2 P10.4
  Bottom Layer w15: TEENSY1.2@2390,3300 P10.4@2390,3500
NC_3: P10.5 TEENSY1.3/CANTX | length 400
  Top Layer w15: TEENSY1.3/CANTX P10.5
  Bottom Layer w15: TEENSY1.3/CANTX@2290,3300 P10.5@2290,3500
NC_3V3: P10.15 TEENSY1.3V3 | length 400
  Top Layer w15: TEENSY1.3V3 P10.15
  Bottom Layer w15: TEENSY1.3V3@1290,3300 P10.15@1290,3500
NC_3V3LO: P11.3 TEENSY1.3V3_LO | length 400
  Top Layer w15: P11.3 TEENSY1.3V3_LO
  Bottom Layer w15: P11.3@2490,2500 TEENSY1.3V3_LO@2490,2700
NC_4: P10.6 TEENSY1.4/CANRX | length 400
  Top Layer w15: TEENSY1.4/CANRX P10.6
  Bottom Layer w15: TEENSY1.4/CANRX@2190,3300 P10.6@2190,3500
NC_5: P10.7 TEENSY1.5 | length 400
  Top Layer w15: TEENSY1.5 P10.7
  Bottom Layer w15: TEENSY1.5@2090,3300 P10.7@2090,3500
NC_24: P10.16 TEENSY1.24 | length 400
  Top Layer w15: TEENSY1.24 P10.16
  Bottom Layer w15: TEENSY1.24@1190,3300 P10.16@1190,3500
NC_25: P10.17 TEENSY1.25 | length 400
  Top Layer w15: TEENSY1.25 P10.17
  Bottom Layer w15: TEENSY1.25@1090,3300 P10.17@1090,3500
NC_26: P10.18 TEENSY1.26 | length 400
  Top Layer w15: TEENSY1.26 P10.18
  Bottom Layer w15: TEENSY1.26@990,3300 P10.18@990,3500
NC_A1: P11.12 TEENSY1.15/A1 | length 400
  Top Layer w15: P11.12@1591.05,2495.68 TEENSY1.15/A1@1591.05,2695.68
  Bottom Layer w15: P11.12@1590,2500 TEENSY1.15/A1@1590,2700
NC_A2: P11.11 TEENSY1.16/A2 | length 400
  Top Layer w15: P11.11@1691.05,2495.68 TEENSY1.16/A2@1691.05,2695.68
  Bottom Layer w15: P11.11@1690,2500 TEENSY1.16/A2@1690,2700
NC_A4: P11.9 TEENSY1.18/A4/SDA | length 400
  Top Layer w15: P11.9@1891.05,2495.68 TEENSY1.18/A4/SDA@1891.05,2695.68
  Bottom Layer w15: P11.9@1890,2500 TEENSY1.18/A4/SDA@1890,2700
NC_VIN: P11.1 TEENSY1.VIN | length 400
  Top Layer w15: P11.1 TEENSY1.VIN
  Bottom Layer w15: P11.1@2690,2500 TEENSY1.VIN@2690,2700
NetC15_1: C15.1 IC5.13 | length 92.1
  Top Layer w15: C15.1@1475,2255 1475,2253.43 1493.82,2234.61 IC5.13
NetC24_1: C24.1 IC6.13 | length 92.1
  Top Layer w15: C24.1@1165,2255 1165,2253.43 1183.82,2234.61 IC6.13
NetC38_1: C38.1 U1.4 | length 71
  Top Layer w20: U1.4 775.83,1037.6 780,1033.43 C38.1@780,1025
NetC39_1: C39.1 U2.4 | length 80.2
  Top Layer w20: U2.4 775.83,1337.6 790,1323.43 C39.1@790,1320
NetC40_1: C40.1 U3.4 | length 71.9
  Top Layer w20: U3.4 775.83,327.6 778.43,325 C40.1@790,325
NetC45_1: C45.1 U4.4 | length 66.9
  Top Layer w20: U4.4 2640.83,857.6 2643.43,855 C45.1@2650,855
NetC46_1: C46.1 U5.4 | length 69
  Top Layer w20: U5.4 775.83,727.6 783.43,720 C46.1@785,720
NetC51_1: C51.1 U6.4 | length 71.9
  Top Layer w20: U6.4 2640.83,537.6 2643.43,535 C51.1@2655,535
NetC52_1: C52.1 U7.4 | length 71.9
  Top Layer w20: U7.4 2640.83,217.6 2643.43,215 C52.1@2655,215
OUT_MAIN: CFD.26 IC3.7 IC4.1 | length 943.4
  Top Layer w15: IC3.7@1490,1590 1490.33,1589.67 1490.33,1557.99 1500.53,1547.8 1591.93,1547.8 1619.73,1520 v1(1620,1520) ; IC4.1@1666.24,1408.88 1667.36,1410 v1(1740,1410) ; CFD.26 1689.37,942.44 1705,958.07 v1(1705,960)
  Bottom Layer w15: v1(1620,1520) 1726.36,1413.64 1736.36,1413.64 v1(1740,1410) 1738.84,1408.84 1738.84,988.84 1710,960 v1(1705,960)
OUT_MAIN_33: IC3.10 pad.4@1615,1830 | length 174.1
  Top Layer w15: IC3.10 1490.33,1822.03 1490.33,1852.01 1500.53,1862.2 1573.63,1862.2 1605.83,1830 pad.4@1615,1830
OUT_SMALL: CFD.30 IC2.1 IC3.2 | length 880.3
  Top Layer w15: v1(1344.25,1530.57) 1344.25,1534.39 1359.67,1549.81 1359.67,1588.64 IC3.2@1360.51,1589.49 ; IC2.1@1406.24,1408.88 1426.36,1388.75 1426.36,1373.64 v1(1430,1370) ; v1(1560,1005) 1563.64,1001.36 1563.64,990.63 1610.63,943.63 CFD.30
  Bottom Layer w15: v1(1344.25,1530.57) 1344.25,1490.75 1430,1405 v1(1430,1370) 1431.16,1368.84 1431.16,1077.7 1503.86,1005 v1(1560,1005)
OUT_SMALL_33: IC3.15 pad.4@1145,1805 | length 270.6
  Top Layer w15: pad.4@1140,1815 1190,1815 1225.87,1779.13 1349.47,1779.13 1359.67,1789.33 1359.67,1819.31 IC3.15
RST_TEST: CFD.16 IC1.1 | length 813.1
  Top Layer w10: IC1.1 1324.57,391.14 1328.43,395 v1(1390,395) 1707.06,395 1790.67,478.61 1790.67,633.37 1755,669.04 1755,745 1765,755 CFD.16@1780,755
RST_TEST_33: IC1.16 P11.24 TEENSY1.33/A14 | length 4082.2
  Top Layer w10: IC1.16 1324.68,159.22 1324.68,67.11 v1(1324.78,67)
  Top Layer w15: P11.24@391.05,2495.68 TEENSY1.33/A14@391.05,2695.68
  Bottom Layer w10: P11.24 150,2255 150,342.57 472.57,20 1295,20 1306.05,31.05 1306.05,41.77 1324.78,60.51 v1(1324.78,67)
  Bottom Layer w15: P11.24@390.26,2490.66 TEENSY1.33/A14@390.26,2690.66
SCAN_CLK: CFD.43 IC1.7 | length 544.3
  Top Layer w10: IC1.7 1171.02,458.98 v1(1170,460) 1240.88,530.88 1392.94,530.88 1459.22,597.17 1459.22,652.16 1502.06,695 CFD.43@1515,695
SCAN_CLK_33: IC1.10 P11.21 TEENSY1.36/A17 | length 3902
  Top Layer w10: v1(1150,95) 1150,101.49 1167.17,118.66 1167.17,155.47 IC1.10
  Top Layer w15: P11.21@691.05,2495.68 TEENSY1.36/A17@691.05,2695.68
  Bottom Layer w10: P11.21 195,2000 195,361.21 491.21,65 1120,65 v1(1150,95)
  Bottom Layer w15: P11.21@690.26,2495.66 TEENSY1.36/A17@690.26,2695.66
SPI_CLK_MAIN: IC5.12 P11.14 TEENSY1.13/SCK | length 577.9
  Top Layer w15: TEENSY1.13/SCK P11.14 1519.41,2365.59 IC5.12
SPI_CLK_SMALL: IC6.12 P10.24 TEENSY1.32/A13 | length 1953.4
  Top Layer w10: TEENSY1.32/A13 831.5,2853.5 991.5,2853.5 1134.03,2710.97 1134.03,2491.54 1209.41,2416.15 IC6.12@1209.41,2175.59
  Top Layer w15: TEENSY1.32/A13 P10.24 ; IC6.12@1209.41,2175.59 IC6.12@1210,2175
  Bottom Layer w15: TEENSY1.32/A13 P10.24
SPI_DIN_MAIN: IC5.10 P10.13 TEENSY1.11/MOSI | length 1561.4
  Top Layer w10: IC5.10 1572.8,2172.87 1572.8,2382.8 v1(1575,2385)
  Top Layer w15: TEENSY1.11/MOSI P10.13
  Bottom Layer w10: TEENSY1.11/MOSI 1490,2750.15 1534.8,2705.36 1534.8,2425.2 v1(1575,2385)
  Bottom Layer w15: TEENSY1.11/MOSI@1490,3300 P10.13@1490,3500
SPI_DIN_SMALL: IC6.10 P10.2 TEENSY1.0/RX | length 2485.9
  Top Layer w10: IC6.10 1260.59,2409.69 1329.53,2478.63 1329.53,2739.53 v1(1535,2945)
  Top Layer w15: TEENSY1.0/RX P10.2
  Bottom Layer w10: v1(1535,2945) 1799,3209 2509,3209 TEENSY1.0/RX@2590,3290
  Bottom Layer w15: TEENSY1.0/RX@2590,3300 P10.2@2590,3500
SPI_DOUT_MAIN: IC5.9 P10.14 TEENSY1.12/MISO | length 1612.9
  Top Layer w10: IC5.9 1598.09,2172.58 1598.09,2318.09 v1(1600,2320)
  Top Layer w15: TEENSY1.12/MISO P10.14
  Bottom Layer w10: TEENSY1.12/MISO 1390,2750.15 1450.47,2689.68 1450.47,2469.53 v1(1600,2320)
  Bottom Layer w15: TEENSY1.12/MISO@1390,3300 P10.14@1390,3500
SPI_DOUT_SMALL: IC6.9 P10.3 TEENSY1.1/TX | length 2414.2
  Top Layer w10: IC6.9 1286.18,2414.07 1350.47,2478.36 1350.47,2710.63 1562,2922.15 1562,3028 v1(1560,3030)
  Top Layer w15: TEENSY1.1/TX P10.3
  Bottom Layer w10: v1(1560,3030) 1754,3224 2419,3224 TEENSY1.1/TX
  Bottom Layer w15: TEENSY1.1/TX@2490,3300 P10.3@2490,3500
SPI_INTRPT_MAIN: IC5.8 P10.11 TEENSY1.9/CS | length 1557.6
  Top Layer w10: IC5.8 1621.77,2303.59 1650.47,2332.29 1650.47,3255.47 TEENSY1.9/CS TEENSY1.9/CS@1690,3300
  Top Layer w15: TEENSY1.9/CS P10.11
  Bottom Layer w15: TEENSY1.9/CS@1690,3300 P10.11@1690,3500
SPI_INTRPT_SMALL: IC6.8 P10.19 TEENSY1.27 | length 1697.6
  Top Layer w10: IC6.8@1313.13,2172.03 v1@1313.13,2233.13
  Top Layer w15: TEENSY1.27 P10.19 ; IC6.8 IC6.8@1313.13,2172.03 ; v1@1313.13,2233.13 v1(1315,2235)
  Bottom Layer w10: TEENSY1.27@900,3295 900,3285 1051,3134 1051,2589.9 1129.53,2511.37 1129.53,2420.47 v1(1315,2235)
  Bottom Layer w15: TEENSY1.27 P10.19
TDC_CLK: IC5.5 IC6.5 P11.13 TEENSY1.14/A0 | length 1496.2
  Top Layer w15: v1(1260,1995) 1260.3,1994.7 1260.3,1939.63 IC6.5 ; v1(1375,2380) 1375,2280 1380.5,2274.5 1380.5,2262.78 v1(1384.14,2259.14) ; v1(1420,2635) 1425,2635 1485,2695 TEENSY1.14/A0 ; P11.13@1491.05,2495.68 TEENSY1.14/A0@1491.05,2695.68 ; IC5.5 1571.95,1940.69 1571.95,1971.81 1590,1989.86 v1(1590,1995)
  Bottom Layer w15: v1(1260,1995) v1(1590,1995) ; v1(1375,2380) 1375,2381.81 1347.97,2408.83 1347.97,2562.97 v1(1420,2635) ; v1(1384.14,2259.14) 1425,2218.28 1425,2145 ; P11.13 TEENSY1.14/A0
TDC_EN_MAIN: IC5.1 P10.10 TEENSY1.8 | length 1890.5
  Top Layer w10: IC5.1 1472.09,1943.19 1472.09,1969.63 1556.02,2053.56 1556.7,2053.56 1729.53,2226.39 1729.53,3234.53 TEENSY1.8 1790.46,3295.46 TEENSY1.8@1791,3295.46
  Top Layer w15: TEENSY1.8 P10.10
  Bottom Layer w15: TEENSY1.8@1790,3300 P10.10@1790,3500
TDC_EN_SMALL: IC6.1 P10.20 TEENSY1.28 | length 2058.7
  Top Layer w15: TEENSY1.28 P10.20 ; v1(980.86,1990.86) 1031.72,1940 1156.87,1940 1157.54,1939.33 IC6.1
  Bottom Layer w15: P10.20 TEENSY1.28 790,2795 845,2740 903.69,2740 948.5,2695.19 948.5,2626.5 1032.03,2542.97 1032.03,2254.79 980.86,2203.62 v1(980.86,1990.86)
TDC_START_MAIN: IC5.3 P10.8 TEENSY1.6 | length 1948.5
  Top Layer w10: IC5.3 1523.27,1943.19 1523.27,1977.7 1829.53,2283.96 1829.53,3134.53 1985,3290 TEENSY1.6@1990,3290
  Top Layer w15: TEENSY1.6 P10.8
  Bottom Layer w15: TEENSY1.6@1990,3300 P10.8@1990,3500
TDC_START_SMALL: IC6.3 P10.22 TEENSY1.30 | length 2267.4
  Top Layer w15: TEENSY1.30 P10.22 ; v1(1208,1875) 1208.7,1875.7 1208.7,1938.63 IC6.3
  Bottom Layer w15: P10.22 TEENSY1.30 590,2853.69 748.5,2695.19 748.5,2595.94 847.97,2496.46 847.97,2053.74 994.69,1907.03 1089.71,1907.03 1146.23,1850.5 1178.36,1850.5 1202.86,1875 v1(1208,1875)
TDC_TRIGG_MAIN: IC5.2 P10.9 TEENSY1.7 | length 1917.7
  Top Layer w10: IC5.2 1497.68,1943.19 1497.68,1973.33 1744.53,2220.18 1744.53,3149.53 1885,3290 TEENSY1.7@1885,3295
  Top Layer w15: TEENSY1.7 P10.9
  Bottom Layer w15: TEENSY1.7@1890,3300 P10.9@1890,3500
TDC_TRIGG_SMALL: IC6.2 P10.21 TEENSY1.29 | length 2140.4
  Top Layer w15: TEENSY1.29 P10.21 ; v1(1160,1880) 1160,1885.14 1182.46,1907.6 1182.46,1937.97 IC6.2
  Bottom Layer w15: TEENSY1.29@685,3290 690,3285 690,2853.69 848.5,2695.19 848.5,2595.94 932.03,2512.41 932.03,1997.97 1002.97,1927.03 1112.97,1927.03 v1(1160,1880) ; TEENSY1.29 P10.21
TIME_MAIN_18: IC3.6 IC4.5 P12.1 | length 392.3
  Top Layer w15: IC3.6 1464.74,1587.97 1464.74,1555.26 v2(1500,1520) 1501.91,1518.09 1501.91,1492.97 IC4.5@1523.76,1471.12
  Bottom Layer w15: v2(1500,1520) 1529.5,1549.5 1730.5,1549.5 P12.1
TIME_MAIN_33: IC3.11 IC5.4 P15.1 | length 323.8
  Top Layer w15: IC3.11 1464.74,1822.03 1464.74,1854.7 1492.25,1882.2 1717.8,1882.2 P15.1
  Top Layer w20: P15.1@1729.7,1879.7 P15.1@1730,1880
TIME_SMALL_18: IC2.5 IC3.1 P14.1 | length 375.7
  Top Layer w15: P14.1 1235,1545 1270,1510 ; IC2.5 1272.99,1506.71 1335,1568.72 IC3.1@1335,1590
TIME_SMALL_33: IC3.16 IC6.4 P13.1 | length 300.6
  Top Layer w15: P13.1 1070,1850 1164.44,1850 1173.16,1841.28 1334.07,1841.28 1335,1840.35 IC3.16@1335,1830
VBG_TEST: C25.2 CFD.15 P4.2 | length 960.8
  Top Layer w10: CFD.15 1810.63,735.63 v2@1825,750 ; v1(2165,920) 2250.47,1005.47 2250.47,1041.37 2419.1,1210 P4.2@2430,1210
  Top Layer w20: C25.2 P4.2
  Bottom Layer w10: v2(1827.11,749.94) 1827.11,753.01 1994.1,920 v1(2165,920)
VBG_TEST_I: P4.1 P11.4 TEENSY1.23/A9 | length 1852.7
  Top Layer w15: P11.4 TEENSY1.23/A9
  Top Layer w20: P11.4 2674.53,2210.47 2674.53,1364.53 P4.1
  Bottom Layer w15: P11.4@2390,2500 TEENSY1.23/A9@2390,2700
VDAC_MAIN: C26.2 CFD.22 P5.2 | length 1016
  Top Layer w10: CFD.22@1795,875 1795,885 1819.33,909.33 1941.39,909.33 2164.18,1132.13 2164.18,1194.18 P5.2
  Top Layer w20: C26.2 P5.2
VDAC_MAIN_IO: P5.1 P11.6 TEENSY1.21/A7 | length 1654.1
  Top Layer w15: P11.6 TEENSY1.21/A7
  Top Layer w20: P11.6 2624.53,2060.47 2624.53,1554.53 P5.1
  Bottom Layer w15: P11.6@2190,2500 TEENSY1.21/A7@2190,2700
VDAC_SMALL: C27.2 CFD.34 P8.2 | length 2123
  Top Layer w10: v1(1035,652) 1035,616.53 1040.86,610.67 1159.84,610.67 1185.51,585 C27.2@1190,585 ; C27.2 1188.54,581.97 1257.93,651.35 1257.93,724.98 1407.94,875 CFD.34@1515,875
  Bottom Layer w10: P8.2 661.51,1653.49 707.41,1653.49 939.53,1421.37 939.53,690.47 990,640 1000,640 1007.41,647.41 1030.41,647.41 v1(1035,652)
VDAC_SMALL_IO: P8.1 P11.18 TEENSY1.39/A20 | length 1214.2
  Top Layer w15: P11.18 TEENSY1.39/A20
  Top Layer w20: P8.1 375.47,1839.53 375.47,1950.74 660.76,2236.03 731.03,2236.03 P11.18
VDDAON: C20.2 C21.2 C22.2 CFD.3 CFD.9 CFD.42 P2.2 P26.2 P28.1 | length 2815.1
  Top Layer w15: C22.2@1404.74,585 1404.74,598.17 1441.72,635.15 1441.72,659.41 1495.01,712.7 1513.88,712.7 CFD.42 ; C21.2 v2(1590,599.09) 1590,600 1590.47,600.47 1590.47,641.65 CFD.3 ; CFD.9 1709.53,641.65 1709.53,600.47 1711.91,598.09 1718.49,598.09 C20.2@1760,556.57
  Bottom Layer w30: v2(1464.32,689.76) 1554.08,600 v2@1590,600 ; v2(1590,599.09) 1590,595.5 1620.5,565 1711.74,565 v2(1711.74,598.26) ; 1711.74,553.22 1854.49,410.47 1911.87,410.47 1937.34,385 2285,385 2290,380 P28.1 ; P26.2 2290,389.45 2340.47,439.93 2340.47,1490.47 P2.2
VDDAON_I: P2.1 P11.7 TEENSY1.20/A6 | length 1559.9
  Top Layer w15: P11.7 TEENSY1.20/A6
  Top Layer w20: P11.7 2599.53,1985.47 2599.53,1649.53 P2.1 P2.1@2530,1575
  Bottom Layer w15: P11.7@2090,2500 TEENSY1.20/A6@2090,2700
VDDHV: C16.2 C17.2 C18.2 CFD.5 CFD.14 CFD.39 P19.2 | length 1133.5
  Top Layer w15: CFD.5 1633.09,639.35 1633.09,601.91 v2(1635,600) 1636.91,598.09 1636.91,594.66 1670,561.57 C17.2@1670,560 ; CFD.14 1819.06,715.94 1850.26,684.74 1850.26,683.17 1858.43,675 C18.2@1860,675
  Top Layer w20: C16.2@1410,668.43 1430,688.43 1430,738.07 1466.18,774.25 CFD.39@1509.41,774.25
  Bottom Layer w20: v2(1463.83,767.68) 1464.74,767.68 1631.47,600.96 1634.04,600.96 v2(1635,600)
  Bottom Layer w30: v2(1635,600) 1663.98,600 1778.98,715 v2@1825,715 ; 1780,710 1780,555 P19.2
  other v2: 1824.24,714.36
VDDMAIN: C11.2 C12.2 CFD.20 CFD.25 P7.2 P20.2 P22.1 | length 1926.4
  Top Layer w10: CFD.25 1709.06,919.53 1714.8,925.28 1714.8,927.43 1747.78,960.41 1770.41,960.41 v1(1775,965)
  Top Layer w15: CFD.20 1842.48,834.06 C11.2@1861.46,853.03 ; C11.2 C11.2@1861.46,853.03 ; C12.2@2000,845 1995.26,840.26 1966.37,840.26 1947.94,821.83 1892.66,821.83 C11.2@1861.46,853.03
  Bottom Layer w15: 1828.4,963.4 1830,965
  Bottom Layer w30: v1(1775,965) 1830,965 2285,965 ; v2(1828.4,831.51) 1828.4,963.4 ; P20.2@2285,1030 2290,1035 2290,1560 P7.2 ; P22.1@2290,820 P22.1 P20.2
VDDMAIN_I: P7.1 P11.8 TEENSY1.19/A5/SCL | length 1458.5
  Top Layer w15: P11.8 TEENSY1.19/A5/SCL
  Top Layer w20: P11.8 2574.53,1910.47 2574.53,1744.53 2535,1705 P7.1@2525,1705
  Bottom Layer w15: P11.8@1990,2500 TEENSY1.19/A5/SCL@1990,2700
VDDSMALL: C5.2 CFD.36 P9.2 P21.2 P23.1 | length 1715.5
  Top Layer w20: C5.2@1411.57,755 1489.88,833.31 CFD.36@1509.41,833.31
  Bottom Layer w30: P9.2 710,1485 710,1085 P21.2 ; P23.1 1265,615 v2@1465,815
  other v2: 1468.07,812.49
VDDSMALL_IO: P9.1 P11.19 TEENSY1.38/A19 | length 1285.6
  Top Layer w15: P11.19 TEENSY1.38/A19
  Top Layer w20: P9.1@420,1665 P9.1 350.47,1744.53 350.47,1961.1 884.38,2495 P11.19
VDDTEST: C6.1 CFD.13 P25.2 P27.1 | length 819.7
  Top Layer w10: CFD.13 1794.53,696.26 1797.78,693.01 1799.93,693.01 1823.84,669.1 1823.84,624.58 1863.43,585 C6.1@1865,585
  Bottom Layer w30: v2(1827.74,622.68) 2287.32,622.68 2290,620 ; P25.2 2290,620 ; P27.1@2295,505 2290,510 2290,620
VIN_TEST: CFD.17 D1.2 D2.1 pad.4@1885,745 | length 96.4
  Top Layer w15: CFD.17 1858.08,775 pad.4@1873.08,760
VINN_ZCD_SMALL: CFD.32 J3.1 | length 474.3
  Top Layer w15: J3.1 1275,1120 1450,945 1551.47,945 1568.01,928.46 1568.01,911.12 CFD.32
VINP_LED_SMALL: CFD.31 J2.1 | length 326.8
  Top Layer w10: CFD.31 1589.88,908.94 1589.88,931.34 1533,988.22 1533,1029.4 1585,1081.4 1585,1175 J2.1@1595,1185
VINP_ZCD_SMALL: CFD.33 J4.1 | length 415
  Top Layer w15: J4.1 CFD.33@1550,900
VOUT_TEST: CFD.18 P1.2 | length 989.6
  Top Layer w10: CFD.18 1880.54,794.69 1890.19,804.33 1955.19,804.33 1973.61,822.76 2024.81,822.76 2179.18,977.13 2179.18,1176.24 2342.94,1340 P1.2
VOUT_TEST_I: P1.1 P11.5 TEENSY1.22/A8 | length 1758.4
  Top Layer w15: P11.5 TEENSY1.22/A8
  Top Layer w20: P11.5 2649.53,2135.47 2649.53,1459.53 P1.1 P1.1@2530,1335
  Bottom Layer w15: P11.5@2290,2500 TEENSY1.22/A8@2290,2700
VREF_ATTEN: C29.2 CFD.27 P3.2 | length 1404.6
  Top Layer w10: CFD.27 1669.69,896.22 1675.43,890.47 1675.43,888.32 1683.6,880.16 1754.2,880.16 1814.04,940 C29.2 1861.46,941.97 1959.49,1040 2050,1040 2149.18,1139.18 2149.18,1539.18 P3.2
VREF_ATTEN_O: P3.1 P11.16 TEENSY1.A22/DAC1 | length 2024.6
  Top Layer w15: P11.16@1191.05,2495.68 TEENSY1.A22/DAC1@1191.05,2695.68
  Bottom Layer w15: P11.16 1520.7,2164.3 2185.7,2164.3 P3.1 P3.1@2535,1820 ; P11.16@1190.26,2495.66 TEENSY1.A22/DAC1@1190.26,2695.66
VREF_PREAMP: C28.2 CFD.29 P6.2 | length 2241.4
  Top Layer w10: v1(1600.49,995.49) 1600.49,989 1630.32,959.17 CFD.29
  Top Layer w15: C28.2 1189.27,665.73 1189.27,724.27 v1(1190,725)
  Bottom Layer w15: P6.2 962.26,1472.74 962.26,796.6 1033.86,725 v1(1190,725) 1330,725 v1@1600,995
VREF_PREAMP_IO: P6.1 P11.17 TEENSY1.21/DAC0 | length 1110.2
  Top Layer w15: P11.17@1091.05,2495.68 TEENSY1.21/DAC0@1091.05,2695.68
  Top Layer w20: P6.1 716.03,2211.03 806.03,2211.03 P11.17
pads on no net: CFD.4 CFD.6 CFD.8 CFD.10 CFD.11 CFD.19 CFD.23 CFD.37 IC1.6 IC5.6 IC6.6 TEENSY1.3V3_2 TEENSY1.A10 TEENSY1.A11 TEENSY1.AREF TEENSY1.GND3 TEENSY1.PROG TEENSY1.RESET TEENSY1.U5V TEENSY1.UD+ TEENSY1.UD- TEENSY1.UGND1 TEENSY1.UGND2 TEENSY1.VBAT TEENSY1.VUSB

## Polygon pours and split planes (outlines as drawn)
GND on Top Layer "NONET_L-01_P-001" (solid, remove dead copper, pour order 5): 0,0 3180,0 3180,3670 0,3670
GND on Bottom Layer "NONET_L-01_P-001" (solid, remove dead copper, pour order 3): 0,3670 3180,3670 3180,0 0,0

## Other copper
Top Layer:
  rectangle net +1.8VD_SHIFT: 1120,280 1215,315
  rectangle net +1.8VA: 2095,670 2200,730
  rectangle net +3.3VPSU: 390,260 460,1340
  region net +3.3VCHIP: 2465,855 2549.44,770.56 2465,760
  region net +3.3VCHIP: 2470,532.5 2554.44,448.06 2470,437.5
  region net +3.3VCHIP: 2470,220 2545,145 2470,145
  region net +3.3VCHIP: 1960,355 2225,620 2225,355
  region net +3.3VD: 1415,2020 1475,2080 1475,2205 1455,2205 1455,2140 1360,2140 1360,2020
  region net +1.8VD_SHIFT: 1215,420 1215,280 1385,280 1385,315 1255,315 1255,420
  region net VIN_TEST: 1965,800 2005,800 2005,675 1965,675
  region net VIN_TEST: 1885,785 1950,785 1965,800 1965,705 1945,725 1885,725
  region net +3.3VD_SHIFT: 1050,145 1050,270 1255,270 1255,185 1240,185 1240,225 1090,225 1090,145
  region net TIME_MAIN_33: 1535,1915 1555,1915 1555,1905 1575,1885 1515,1885 1535,1905
  region net TIME_SMALL_33: 1230,1915 1245,1915 1245,1905 1305,1845 1230,1845
  region net +1.8VD: 1225,1435 1225,1405 1290,1405 1290,1410 1290,1425 1445,1425 1445,1435 1290,1435
  region net +1.8VD: 1485,1435 1485,1405 1550,1405 1550,1410 1550,1425 1675,1425 1675,1435 1610,1435 1550,1435
  region net +1.8VD: 1405,1560 1405,1630 1360,1675 1490,1675 1445,1630 1445,1560
  region net +3.3VD: 1255,1745 1375,1745 1405,1775 1405,1795 1420,1795 1420,1775 1450,1745 1595,1745 1595,1705 1255,1705
  region net +3.3VD: 1050,2020 1050,2140 1145,2140 1145,2205 1165,2205 1165,2020
  region net +3.3VD: 1050,2095 1410,2095 1410,2020 1050,2020
Bottom Layer:
  rectangle net GND: 1570,695 1730,855
  rectangle net +3.3VCHIP: 2565,120 2655,965
  rectangle net +1.8VPSU: 2450,155 2540,855
  region net TDC_CLK: 1265,1995 1425,2155 1585,1995
  region net VDDHV: 1710,635 1770,575 1770,695
  region net VDDSMALL: 875,600 875,895 925,895 925,600

## Silkscreen, mask and mechanical layers (free items; w line width, h text height)
Top Overlay:
  text "GND" at 3120,3250.01 h30 r90
  text "GND" at 60,3149.99 h30 r270
  text "USB -->" at 1925.07,2960.01 h60
  text "GND" at 3120,2950.01 h30 r90
  text "GND" at 60,2849.99 h30 r270
  text "GND" at 3120,2650.01 h30 r90
  text "GND" at 60,2549.99 h30 r270
  text "GND" at 3120,2350 h30 r90
  text "MEASUREMENT / JUMPERS" at 167.02,2334.83 h60 r270
  text "GND" at 60,2249.99 h30 r270
  text "GND" at 3120,2050.01 h30 r90
  text "GND" at 60,1949.99 h30 r270
  text "GND" at 3120,1750.01 h30 r90
  text "GND" at 60,1649.99 h30 r270
  text "GND" at 3120,1450.01 h30 r90
  text "VD" at 280.01,1384.98 h60 r270
  text "GND" at 60,1349.99 h30 r270
  text "GND" at 3120,1150.01 h30 r90
  text "VA" at 280.01,1094.98 h60 r270
  text "GND" at 60,1049.99 h30 r270
  text "LDO" at 2455,1020 h20
  text "MEASUREMENT / JUMPERS" at 2767.98,950.18 h60 r90
  text "SMALL" at 280.01,909.95 h60 r270
  text "LDO" at 676.68,885 h20
  text "GND" at 3120,850.01 h30 r90
  text "MAIN" at 2919.99,805.03 h60 r90